# EAGLE board Type2brd (EAGLE 9.7.0)
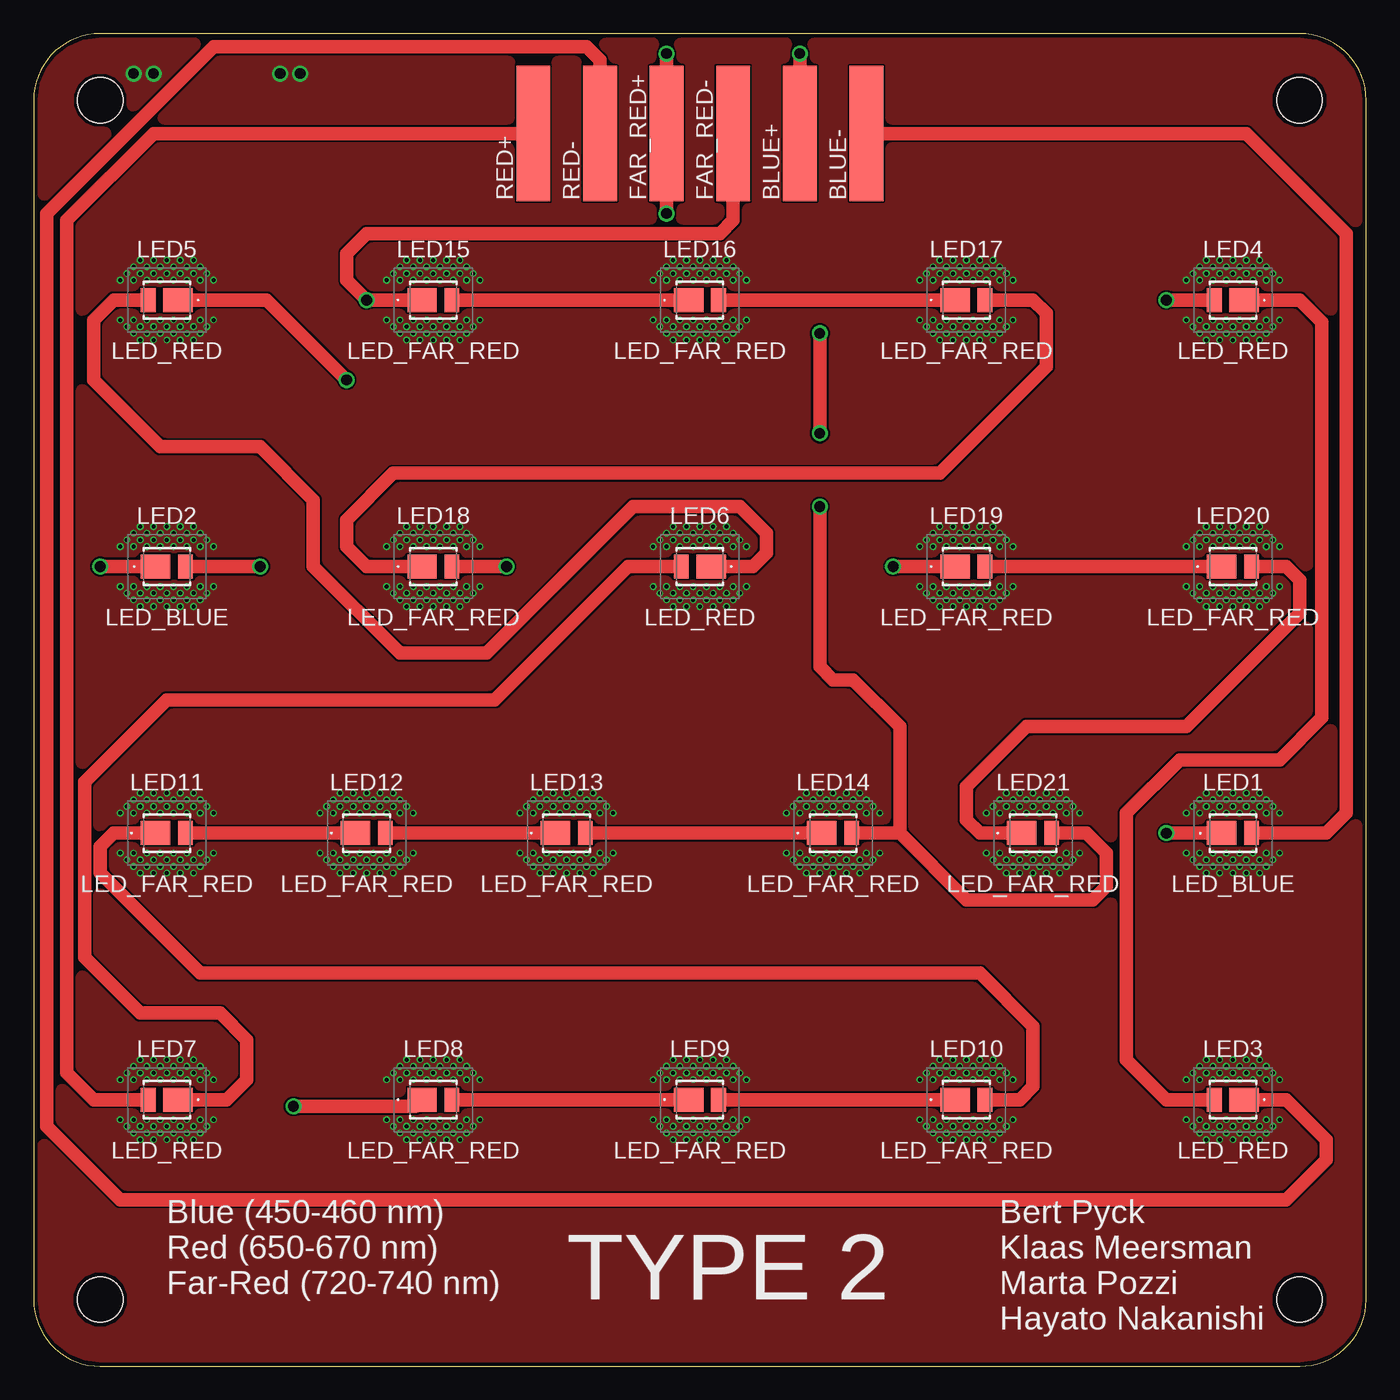
[diagram p0: board, top side]
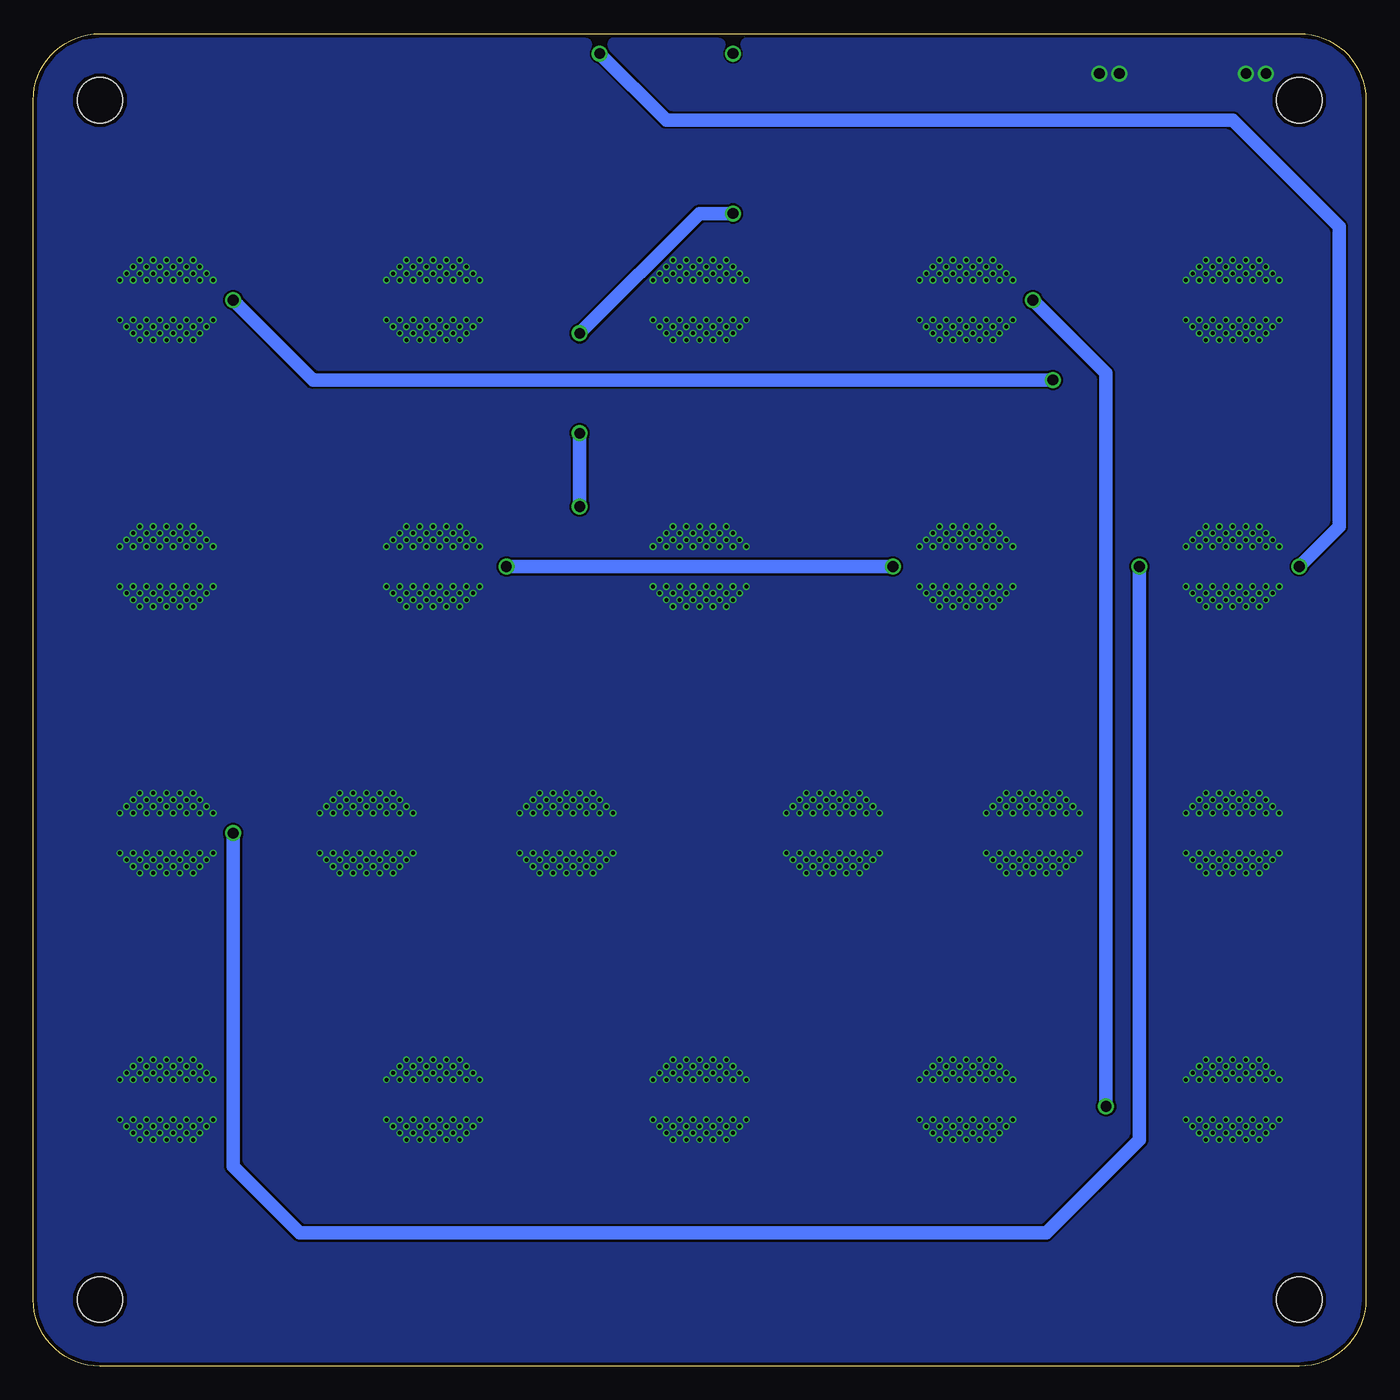
[diagram p1: board, bottom side, seen from below]

Size 100 x 100 mm. Coordinates in mm from the lower left corner, seen from the top.
Outline: 0,95 0,5 arc90 5,0 95,0 arc90 100,5 100,95 arc90 95,100 5,100 arc90 0,95
Copper layers (1*16): Top / Bottom
Stack-up Default Layer Stack: Top User Defined 0.035mm / Dielectric-1 User Defined 1.5mm / Bottom User Defined 0.035mm
Design rules: minimum copper width 6mil, minimum drill size 0.3mm, copper clearance wire_polygon to wire_polygon 6mil, copper clearance wire_polygon to pad_smd 6mil, copper clearance wire_polygon to via 6mil, copper clearance pad_smd to pad_smd 6mil, copper clearance pad_smd to via 6mil, copper clearance via to via 6mil, copper clearance smd to pad (same net) 0mil, copper clearance smd to via (same net) 0mil, copper clearance smd to smd (same net) 0mil, dimension clearance 0.3mm, via restrict clearance 0mil, restrict clearance 0mil, drill distance 10mil, keepout clearance 0mil
Holes 3.4 mm at 5,95 95,95 95,5 5,5

## Footprints (pad centres in the part's own frame; a part is rotated, then mirrored left to right if it is on the bottom)
SOLDERPAD = smd 2.54 x 10.16: 1 0,0
LED_BLUE = smd 2.2 x 1.8: 1 -0.845,0 | smd 1.1 x 1.8: 2 1.395,0
LED_RED = smd 2.2 x 1.8: 1 0.845,0 | smd 1.1 x 1.8: 2 -1.395,0
LED_FAR_RED = smd 2.2 x 1.8: 1 -0.845,0 | smd 1.1 x 1.8: 2 1.395,0

## Placement (x,y rotation side)
BLUE+  [SOLDERPAD]  57.5,92.5 0 top
BLUE-  [SOLDERPAD]  62.5,92.5 0 top
FAR_RED+  [SOLDERPAD]  47.5,92.5 0 top
FAR_RED-  [SOLDERPAD]  52.5,92.5 0 top
LED1  LED_BLUE  [LED_BLUE]  90,40 0 top
LED2  LED_BLUE  [LED_BLUE]  10,60 0 top
LED3  LED_RED  [LED_RED]  90,20 0 top
LED4  LED_RED  [LED_RED]  90,80 0 top
LED5  LED_RED  [LED_RED]  10,80 0 top
LED6  LED_RED  [LED_RED]  50,60 0 top
LED7  LED_RED  [LED_RED]  10,20 0 top
LED8  LED_FAR_RED  [LED_FAR_RED]  30,20 0 top
LED9  LED_FAR_RED  [LED_FAR_RED]  50,20 0 top
LED10  LED_FAR_RED  [LED_FAR_RED]  70,20 0 top
LED11  LED_FAR_RED  [LED_FAR_RED]  10,40 0 top
LED12  LED_FAR_RED  [LED_FAR_RED]  25,40 0 top
LED13  LED_FAR_RED  [LED_FAR_RED]  40,40 0 top
LED14  LED_FAR_RED  [LED_FAR_RED]  60,40 0 top
LED15  LED_FAR_RED  [LED_FAR_RED]  30,80 0 top
LED16  LED_FAR_RED  [LED_FAR_RED]  50,80 0 top
LED17  LED_FAR_RED  [LED_FAR_RED]  70,80 0 top
LED18  LED_FAR_RED  [LED_FAR_RED]  30,60 0 top
LED19  LED_FAR_RED  [LED_FAR_RED]  70,60 0 top
LED20  LED_FAR_RED  [LED_FAR_RED]  90,60 0 top
LED21  LED_FAR_RED  [LED_FAR_RED]  75,40 0 top
RED+  [SOLDERPAD]  37.5,92.5 0 top
RED-  [SOLDERPAD]  42.5,92.5 0 top

## Library data of the parts
BLUE+ BLUE- FAR_RED+ FAR_RED- RED+ RED- = LibraryLEDs
LED1 LED2 = LibraryLEDs; DESCRIPTION: Mid-Power LEDs - Single Colour 2835 Mid-Power ColorRoyal Blue 440-460nm; HEIGHT: 0.8mm; MANUFACTURER_NAME: Wolfspeed; MANUFACTURER_PART_NUMBER: JE2835ARY-N-0002A0000-N0000001; MOUSER_PART_NUMBER: 941-JE2835ARYN02AN; MOUSER_PRICE-STOCK: https://www.mouser.co.uk/ProductDetail/Cree-LED/JE2835ARY-N-0002A0000-N0000001?qs=tlsG%2FOw5FFjsuj%2F2f9X0HQ%3D%3D
LED3-LED7 = LibraryLEDs; DESCRIPTION: Mid-Power LEDs - Single Colour 2835 Mid-Power ColorPhoto Red 650-670nm; HEIGHT: 0.8mm; MANUFACTURER_NAME: CREE LED; MANUFACTURER_PART_NUMBER: JE2835AHR-N-0001A0000-N0000001; MOUSER_PART_NUMBER: 941-JE2835AHRN01AN; MOUSER_PRICE-STOCK: https://www.mouser.co.uk/ProductDetail/Cree-LED/JE2835AHR-N-0001A0000-N0000001?qs=tlsG%2FOw5FFjj3bMznpJhRA%3D%3D
LED8-LED21 = LibraryLEDs; DESCRIPTION: High Power LEDs - Single Color 2835 Mid-Power ColorFar Red 720-740nm; HEIGHT: mm; MANUFACTURER_NAME: CREE LED; MANUFACTURER_PART_NUMBER: JE2835AFR-N-0001A0000-N0000001; MOUSER_PART_NUMBER: 941-JE2835AFRN01AN; MOUSER_PRICE-STOCK: https://www.mouser.co.uk/ProductDetail/Cree-LED/JE2835AFR-N-0001A0000-N0000001?qs=tlsG%2FOw5FFhxeS5Ond46kw%3D%3D

## Nets
N$1: BLUE+.1 LED2.1
N$2: BLUE-.1 LED1.2
N$3: LED1.1 LED2.2
N$4: LED7.2 RED+.1
N$5: LED6.2 LED7.1
N$6: LED5.2 LED6.1
N$7: LED4.2 LED5.1
N$8: LED3.2 LED4.1
N$9: LED3.1 RED-.1
N$10: FAR_RED+.1 LED14.2 LED21.2
N$11: LED13.2 LED14.1
N$12: LED12.2 LED13.1
N$13: LED11.2 LED12.1
N$14: LED10.2 LED11.1
N$15: LED9.2 LED10.1
N$16: LED8.2 LED9.1
N$17: FAR_RED-.1 LED8.1 LED15.1
N$18: LED20.2 LED21.1
N$19: LED19.2 LED20.1
N$20: LED18.2 LED19.1
N$21: LED17.2 LED18.1
N$22: LED16.2 LED17.1
N$23: LED15.2 LED16.1

## Tracks (layer width: path | path; a pad name or v marks a point on that pad's centre or on a via)
N$1  (via drill 0.8 pad 1.1)
  Top 1.016: LED2.1 v5,60 | v57.5,98.5 BLUE+.1
  Bottom 1.016: v5,60 2,63 2,85.5 10,93.5 52.5,93.5 v57.5,98.5
N$2
  Top 1.016: LED1.2 97,40 98.5,41.5 98.5,85 91,92.5 BLUE-.1
N$3  (via drill 0.8 pad 1.1)
  Top 1.016: LED1.1 v85,40 | v17,60 LED2.2
  Bottom 1.016: v85,40 85,15 80,10 24,10 17,17 v17,60
N$4
  Top 1.016: LED7.2 4.5,20 2.5,22 2.5,86 9,92.5 RED+.1
N$5
  Top 1.016: LED6.2 44.6,60 34.6,50 10,50 3.83,43.83 3.83,30.67 8,26.5 14,26.5 16,24.5 16,21.5 14.5,20 LED7.1
N$6
  Top 1.016: LED5.2 6,80 4.5,78.5 4.5,74 9.5,69 17,69 21,65 21,60 27.5,53.5 34,53.5 45,64.5 53,64.5 55,62.5 55,61 54,60 LED6.1
N$7  (via drill 0.8 pad 1.1)
  Top 1.016: LED5.1 17.5,80 v23.5,74 | v85,80 LED4.2
  Bottom 1.016: v23.5,74 79,74 v85,80
N$8
  Top 1.016: LED4.1 95,80 96.67,78.33 96.67,48.67 93.5,45.5 86,45.5 82,41.5 82,23 85,20 LED3.2
N$9
  Top 1.016: RED-.1 42.5,98 41.5,99 13.5,99 1,86.5 1,18 6.5,12.5 94,12.5 97,15.5 97,17 94,20 LED3.1
N$10  (via drill 0.8 pad 1.1)
  Top 1.016: LED21.2 79,40 80.5,38.5 80.5,36 79.5,35 70,35 65,40 | 65,40 LED14.2 | v47.5,98.5 FAR_RED+.1 v47.5,86.5 | 65,40 65,48 61.5,51.5 60,51.5 59,52.5 v59,64.5 | v59,70 v59,77.5
  Bottom 1.016: v59,64.5 v59,70 | v59,77.5 50,86.5 v47.5,86.5
N$11
  Top 1.016: LED13.2 LED14.1
N$12
  Top 1.016: LED13.1 LED12.2
N$13
  Top 1.016: LED11.2 LED12.1
N$14
  Top 1.016: LED11.1 6,40 5,39 5,37 12.5,29.5 71,29.5 75,25.5 75,21 74,20 LED10.2
N$15
  Top 1.016: LED9.2 LED10.1
N$16
  Top 1.016: LED8.2 LED9.1
N$17  (via drill 0.8 pad 1.1)
  Top 1.016: LED15.1 v25,80 23.5,81.5 23.5,83.5 25,85 51.5,85 52.5,86 FAR_RED-.1 | LED8.1 28.66,19.5 v19.5,19.5
  Bottom 1.016: v19.5,19.5 19.5,74.5 v25,80
N$18
  Top 1.016: LED20.2 94,60 95,59 95,56.5 86.5,48 74.5,48 70,43.5 70,41 71,40 LED21.1
N$19
  Top 1.016: LED20.1 LED19.2
N$20  (via drill 0.8 pad 1.1)
  Top 1.016: LED18.2 v35.5,60 | LED19.1 v64.5,60
  Bottom 1.016: v35.5,60 v64.5,60
N$21
  Top 1.016: LED18.1 25,60 23.5,61.5 23.5,63.5 27,67 68,67 76,75 76,79 75,80 LED17.2
N$22
  Top 1.016: LED17.1 LED16.2
N$23
  Top 1.016: LED15.2 LED16.1
TER  (via drill 0.3 pad 0.5, 0.8 pad 1.1)
  other vias: 8,83 9,83 10,83 11,83 12,83 7.5,82.5 8.5,82.5 9.5,82.5 10.5,82.5 11.5,82.5 12.5,82.5 7,82 8,82 9,82 10,82 11,82 12,82 13,82 6.5,81.5 7.5,81.5 8.5,81.5 9.5,81.5 10.5,81.5 11.5,81.5 12.5,81.5 13.5,81.5 6.5,78.5 7.5,78.5 7,78 8,78 7.5,77.5 8.5,77.5 9,78 8.5,78.5 9.5,78.5 10,78 10.5,78.5 11.5,78.5 11,78 12,78 12.5,78.5 13.5,78.5 8,77 9,77 10,77 9.5,77.5 10.5,77.5 11,77 11.5,77.5 12,77 12.5,77.5 13,78 28,83 29,83 30,83 31,83 32,83 27.5,82.5 28.5,82.5 29.5,82.5 30.5,82.5 31.5,82.5 32.5,82.5 27,82 28,82 29,82 30,82 31,82 32,82 33,82 26.5,81.5 27.5,81.5 28.5,81.5 29.5,81.5 30.5,81.5 31.5,81.5 32.5,81.5 33.5,81.5 26.5,78.5 27.5,78.5 27,78 28,78 27.5,77.5 28.5,77.5 29,78 28.5,78.5 29.5,78.5 30,78 30.5,78.5 31.5,78.5 31,78 32,78 32.5,78.5 33.5,78.5 28,77 29,77 30,77 29.5,77.5 30.5,77.5 31,77 31.5,77.5 32,77 32.5,77.5 33,78 48,83 49,83 50,83 51,83 52,83 47.5,82.5 48.5,82.5 49.5,82.5 50.5,82.5 51.5,82.5 52.5,82.5 47,82 48,82 49,82 50,82 51,82 52,82 53,82 46.5,81.5 47.5,81.5 48.5,81.5 49.5,81.5 50.5,81.5 51.5,81.5 52.5,81.5 53.5,81.5 46.5,78.5 47.5,78.5 47,78 48,78 47.5,77.5 48.5,77.5 49,78 48.5,78.5 49.5,78.5 50,78 50.5,78.5 51.5,78.5 51,78 52,78 52.5,78.5 53.5,78.5 48,77 49,77 50,77 49.5,77.5 50.5,77.5 51,77 51.5,77.5 52,77 52.5,77.5 53,78 68,83 69,83 70,83 71,83 72,83 67.5,82.5 68.5,82.5 69.5,82.5 70.5,82.5 71.5,82.5 72.5,82.5 67,82 68,82 69,82 70,82 71,82 72,82 73,82 66.5,81.5 67.5,81.5 68.5,81.5 69.5,81.5 70.5,81.5 71.5,81.5 72.5,81.5 73.5,81.5 66.5,78.5 67.5,78.5 67,78 68,78 67.5,77.5 68.5,77.5 69,78 68.5,78.5 69.5,78.5 70,78 70.5,78.5 71.5,78.5 71,78 72,78 72.5,78.5 73.5,78.5 68,77 69,77 70,77 69.5,77.5 70.5,77.5 71,77 71.5,77.5 72,77 72.5,77.5 73,78 88,83 89,83 90,83 91,83 92,83 87.5,82.5 88.5,82.5 89.5,82.5 90.5,82.5 91.5,82.5 92.5,82.5 87,82 88,82 89,82 90,82 91,82 92,82 93,82 86.5,81.5 87.5,81.5 88.5,81.5 89.5,81.5 90.5,81.5 91.5,81.5 92.5,81.5 93.5,81.5 86.5,78.5 87.5,78.5 87,78 88,78 87.5,77.5 88.5,77.5 89,78 88.5,78.5 89.5,78.5 90,78 90.5,78.5 91.5,78.5 91,78 92,78 92.5,78.5 93.5,78.5 88,77 89,77 90,77 89.5,77.5 90.5,77.5 91,77 91.5,77.5 92,77 92.5,77.5 93,78 8,63 9,63 10,63 11,63 12,63 7.5,62.5 8.5,62.5 9.5,62.5 10.5,62.5 11.5,62.5 12.5,62.5 7,62 8,62 9,62 10,62 11,62 12,62 13,62 6.5,61.5 7.5,61.5 8.5,61.5 9.5,61.5 10.5,61.5 11.5,61.5 12.5,61.5 13.5,61.5 6.5,58.5 7.5,58.5 7,58 8,58 7.5,57.5 8.5,57.5 9,58 8.5,58.5 9.5,58.5 10,58 10.5,58.5 11.5,58.5 11,58 12,58 12.5,58.5 13.5,58.5 8,57 9,57 10,57 9.5,57.5 10.5,57.5 11,57 11.5,57.5 12,57 12.5,57.5 13,58 28,63 29,63 30,63 31,63 32,63 27.5,62.5 28.5,62.5 29.5,62.5 30.5,62.5 31.5,62.5 32.5,62.5 27,62 28,62 29,62 30,62 31,62 32,62 33,62 26.5,61.5 27.5,61.5 28.5,61.5 29.5,61.5 30.5,61.5 31.5,61.5 32.5,61.5 33.5,61.5 26.5,58.5 27.5,58.5 27,58 28,58 27.5,57.5 28.5,57.5 29,58 28.5,58.5 29.5,58.5 30,58 30.5,58.5 31.5,58.5 31,58 32,58 32.5,58.5 33.5,58.5 28,57 29,57 30,57 29.5,57.5 30.5,57.5 31,57 31.5,57.5 32,57 32.5,57.5 33,58 48,63 49,63 50,63 51,63 52,63 47.5,62.5 48.5,62.5 49.5,62.5 50.5,62.5 51.5,62.5 52.5,62.5 47,62 48,62 49,62 50,62 51,62 52,62 53,62 46.5,61.5 47.5,61.5 48.5,61.5 49.5,61.5 50.5,61.5 51.5,61.5 52.5,61.5 53.5,61.5 47.5,58.5 47.5,57.5 48.5,57.5 49,58 48.5,58.5 49.5,58.5 50,58 50.5,58.5 51.5,58.5 51,58 52,58 52.5,58.5 53.5,58.5 48,57 49,57 50,57 49.5,57.5 50.5,57.5 51,57 51.5,57.5 52,57 52.5,57.5 53,58 68,63 69,63 70,63 71,63 72,63 67.5,62.5 68.5,62.5 69.5,62.5 70.5,62.5 71.5,62.5 72.5,62.5 67,62 68,62 69,62 70,62 71,62 72,62 73,62 66.5,61.5 67.5,61.5 68.5,61.5 69.5,61.5 70.5,61.5 71.5,61.5 72.5,61.5 73.5,61.5 66.5,58.5 67.5,58.5 67,58 68,58 67.5,57.5 68.5,57.5 69,58 68.5,58.5 69.5,58.5 70,58 70.5,58.5 71.5,58.5 71,58 72,58 72.5,58.5 73.5,58.5 68,57 69,57 70,57 69.5,57.5 70.5,57.5 71,57 71.5,57.5 72,57 72.5,57.5 73,58 88,63 89,63 90,63 91,63 92,63 87.5,62.5 88.5,62.5 89.5,62.5 90.5,62.5 91.5,62.5 92.5,62.5 87,62 88,62 89,62 90,62 91,62 92,62 93,62 86.5,61.5 87.5,61.5 88.5,61.5 89.5,61.5 90.5,61.5 91.5,61.5 92.5,61.5 93.5,61.5 86.5,58.5 87.5,58.5 87,58 88,58 87.5,57.5 88.5,57.5 89,58 88.5,58.5 89.5,58.5 90,58 90.5,58.5 91.5,58.5 91,58 92,58 92.5,58.5 93.5,58.5 88,57 89,57 90,57 89.5,57.5 90.5,57.5 91,57 91.5,57.5 92,57 92.5,57.5 93,58 8,43 9,43 10,43 11,43 12,43 7.5,42.5 8.5,42.5 9.5,42.5 10.5,42.5 11.5,42.5 12.5,42.5 7,42 8,42 9,42 10,42 11,42 12,42 13,42 6.5,41.5 7.5,41.5 8.5,41.5 9.5,41.5 10.5,41.5 11.5,41.5 12.5,41.5 13.5,41.5 6.5,38.5 7.5,38.5 7,38 8,38 7.5,37.5 8.5,37.5 9,38 8.5,38.5 9.5,38.5 10,38 10.5,38.5 11.5,38.5 11,38 12,38 12.5,38.5 13.5,38.5 8,37 9,37 10,37 9.5,37.5 10.5,37.5 11,37 11.5,37.5 12,37 12.5,37.5 13,38 23,43 24,43 25,43 26,43 27,43 22.5,42.5 23.5,42.5 24.5,42.5 25.5,42.5 26.5,42.5 27.5,42.5 22,42 23,42 24,42 25,42 26,42 27,42 28,42 21.5,41.5 22.5,41.5 23.5,41.5 24.5,41.5 25.5,41.5 26.5,41.5 27.5,41.5 28.5,41.5 21.5,38.5 22.5,38.5 22,38 23,38 22.5,37.5 23.5,37.5 24,38 23.5,38.5 24.5,38.5 25,38 25.5,38.5 26.5,38.5 26,38 27,38 27.5,38.5 28.5,38.5 23,37 24,37 25,37 24.5,37.5 25.5,37.5 26,37 26.5,37.5 27,37 27.5,37.5 28,38 38,43 39,43 40,43 41,43 42,43 37.5,42.5 38.5,42.5 39.5,42.5 40.5,42.5 41.5,42.5 42.5,42.5 37,42 38,42 39,42 40,42 41,42 42,42 43,42 36.5,41.5 37.5,41.5 38.5,41.5 39.5,41.5 40.5,41.5 41.5,41.5 42.5,41.5 43.5,41.5 36.5,38.5 37.5,38.5 37,38 38,38 37.5,37.5 38.5,37.5 39,38 38.5,38.5 39.5,38.5 40,38 40.5,38.5 41.5,38.5 41,38 42,38 42.5,38.5 43.5,38.5 38,37 39,37 40,37 39.5,37.5 40.5,37.5 41,37 41.5,37.5 42,37 42.5,37.5 43,38 58,43 59,43 60,43 61,43 62,43 57.5,42.5 58.5,42.5 59.5,42.5 60.5,42.5 61.5,42.5 62.5,42.5 57,42 58,42 59,42 60,42 61,42 62,42 63,42 56.5,41.5 57.5,41.5 58.5,41.5 59.5,41.5 60.5,41.5 61.5,41.5 62.5,41.5 63.5,41.5 56.5,38.5 57.5,38.5 57,38 58,38 57.5,37.5 58.5,37.5 59,38 58.5,38.5 59.5,38.5 60,38 60.5,38.5 61.5,38.5 61,38 62,38 62.5,38.5 63.5,38.5 58,37 59,37 60,37 59.5,37.5 60.5,37.5 61,37 61.5,37.5 62,37 62.5,37.5 63,38 73,43 74,43 75,43 76,43 77,43 72.5,42.5 73.5,42.5 74.5,42.5 75.5,42.5 76.5,42.5 77.5,42.5 72,42 73,42 74,42 75,42 76,42 77,42 78,42 71.5,41.5 72.5,41.5 73.5,41.5 74.5,41.5 75.5,41.5 76.5,41.5 77.5,41.5 78.5,41.5 71.5,38.5 72.5,38.5 72,38 73,38 72.5,37.5 73.5,37.5 74,38 73.5,38.5 74.5,38.5 75,38 75.5,38.5 76.5,38.5 76,38 77,38 77.5,38.5 78.5,38.5 73,37 74,37 75,37 74.5,37.5 75.5,37.5 76,37 76.5,37.5 77,37 77.5,37.5 78,38 88,43 89,43 90,43 91,43 92,43 87.5,42.5 88.5,42.5 89.5,42.5 90.5,42.5 91.5,42.5 92.5,42.5 87,42 88,42 89,42 90,42 91,42 92,42 93,42 86.5,41.5 87.5,41.5 88.5,41.5 89.5,41.5 90.5,41.5 91.5,41.5 92.5,41.5 93.5,41.5 86.5,38.5 87.5,38.5 87,38 88,38 87.5,37.5 88.5,37.5 89,38 88.5,38.5 89.5,38.5 90,38 90.5,38.5 91.5,38.5 91,38 92,38 92.5,38.5 93.5,38.5 88,37 89,37 90,37 89.5,37.5 90.5,37.5 91,37 91.5,37.5 92,37 92.5,37.5 93,38 8,23 9,23 10,23 11,23 12,23 7.5,22.5 8.5,22.5 9.5,22.5 10.5,22.5 11.5,22.5 12.5,22.5 7,22 8,22 9,22 10,22 11,22 12,22 13,22 6.5,21.5 7.5,21.5 8.5,21.5 9.5,21.5 10.5,21.5 11.5,21.5 12.5,21.5 13.5,21.5 6.5,18.5 7.5,18.5 7,18 8,18 7.5,17.5 8.5,17.5 9,18 8.5,18.5 9.5,18.5 10,18 10.5,18.5 11.5,18.5 11,18 12,18 12.5,18.5 13.5,18.5 8,17 9,17 10,17 9.5,17.5 10.5,17.5 11,17 11.5,17.5 12,17 12.5,17.5 13,18 28,23 29,23 30,23 31,23 32,23 27.5,22.5 28.5,22.5 29.5,22.5 30.5,22.5 31.5,22.5 32.5,22.5 27,22 28,22 29,22 30,22 31,22 32,22 33,22 26.5,21.5 27.5,21.5 28.5,21.5 29.5,21.5 30.5,21.5 31.5,21.5 32.5,21.5 33.5,21.5 26.5,18.5 27.5,18.5 27,18 28,18 27.5,17.5 28.5,17.5 29,18 28.5,18.5 29.5,18.5 30,18 30.5,18.5 31.5,18.5 31,18 32,18 32.5,18.5 33.5,18.5 28,17 29,17 30,17 29.5,17.5 30.5,17.5 31,17 31.5,17.5 32,17 32.5,17.5 33,18 48,23 49,23 50,23 51,23 52,23 47.5,22.5 48.5,22.5 49.5,22.5 50.5,22.5 51.5,22.5 52.5,22.5 47,22 48,22 49,22 50,22 51,22 52,22 53,22 46.5,21.5 47.5,21.5 48.5,21.5 49.5,21.5 50.5,21.5 51.5,21.5 52.5,21.5 53.5,21.5 46.5,18.5 47.5,18.5 47,18 48,18 47.5,17.5 48.5,17.5 49,18 48.5,18.5 49.5,18.5 50,18 50.5,18.5 51.5,18.5 51,18 52,18 52.5,18.5 53.5,18.5 48,17 49,17 50,17 49.5,17.5 50.5,17.5 51,17 51.5,17.5 52,17 52.5,17.5 53,18 68,23 69,23 70,23 71,23 72,23 67.5,22.5 68.5,22.5 69.5,22.5 70.5,22.5 71.5,22.5 72.5,22.5 67,22 68,22 69,22 70,22 71,22 72,22 73,22 66.5,21.5 67.5,21.5 68.5,21.5 69.5,21.5 70.5,21.5 71.5,21.5 72.5,21.5 73.5,21.5 66.5,18.5 67.5,18.5 67,18 68,18 67.5,17.5 68.5,17.5 69,18 68.5,18.5 69.5,18.5 70,18 70.5,18.5 71.5,18.5 71,18 72,18 72.5,18.5 73.5,18.5 68,17 69,17 70,17 69.5,17.5 70.5,17.5 71,17 71.5,17.5 72,17 72.5,17.5 73,18 88,23 89,23 90,23 91,23 92,23 87.5,22.5 88.5,22.5 89.5,22.5 90.5,22.5 91.5,22.5 92.5,22.5 87,22 88,22 89,22 90,22 91,22 92,22 93,22 86.5,21.5 87.5,21.5 88.5,21.5 89.5,21.5 90.5,21.5 91.5,21.5 92.5,21.5 93.5,21.5 86.5,18.5 87.5,18.5 87,18 88,18 87.5,17.5 88.5,17.5 89,18 88.5,18.5 89.5,18.5 90,18 90.5,18.5 91.5,18.5 91,18 92,18 92.5,18.5 93.5,18.5 88,17 89,17 90,17 89.5,17.5 90.5,17.5 91,17 91.5,17.5 92,17 92.5,17.5 93,18 48,58 47,58 46.5,58.5 20,97 18.5,97 9,97 7.5,97
  pour Top: 0,100 0,0 100,0 100,100
  pour Bottom: 0,100 0,0 100,0 100,100

## Text on the board
NamesTop: Blue (450-460 nm) / Red (650-670 nm) / Far-Red (720-740 nm) | Bert Pyck / Klaas Meersman / Marta Pozzi / Hayato Nakanishi | TYPE 2